# Altium PCB PCB.PcbDoc
Units mm, origin at the board's own origin, x right, y up, seen from the top; angles counter-clockwise.
Board outline 37.2 x 44.2 mm, 2 copper layers (Top Layer, Bottom Layer); 15 components, 11 nets, 90 pads, 32 vias.
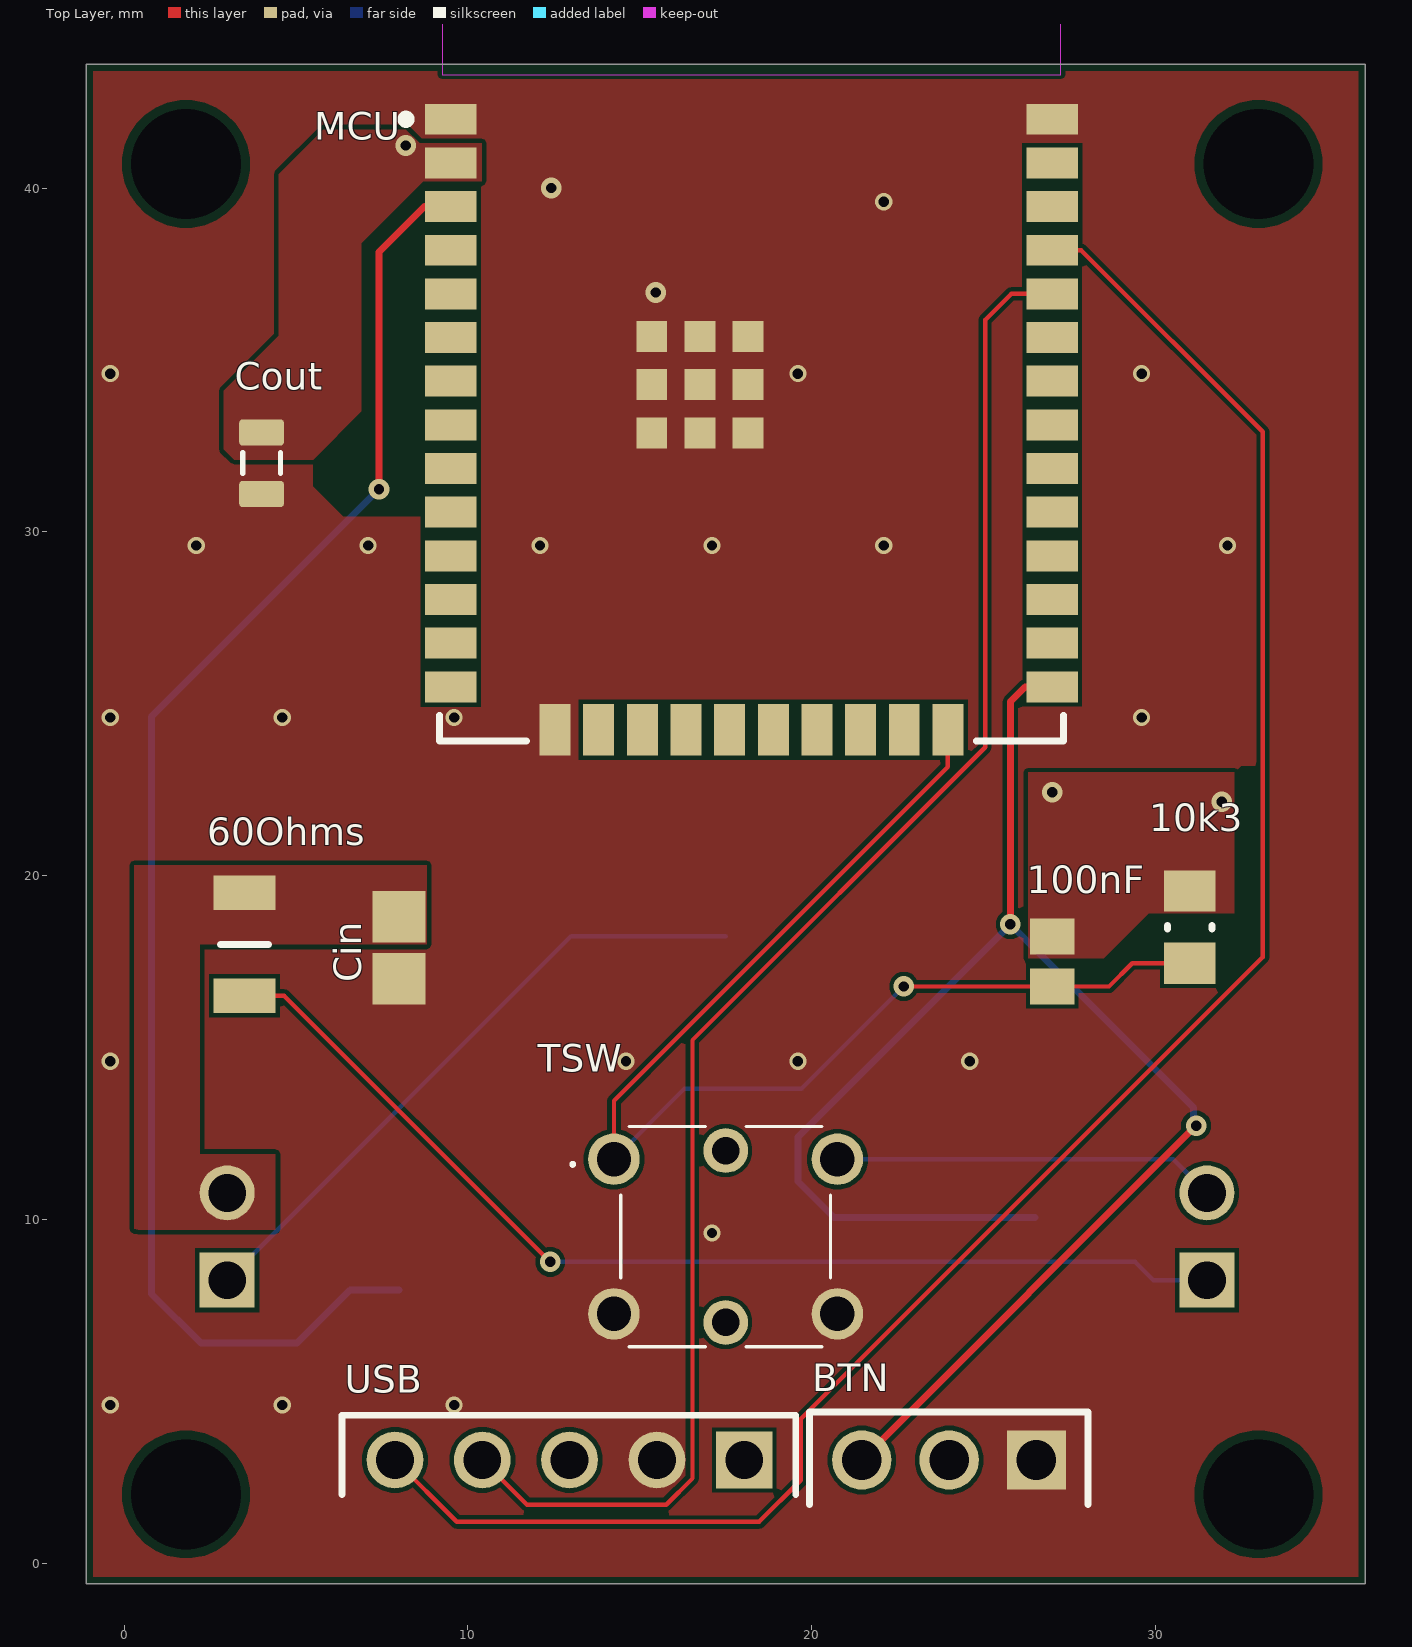
[diagram p0: Top Layer view]
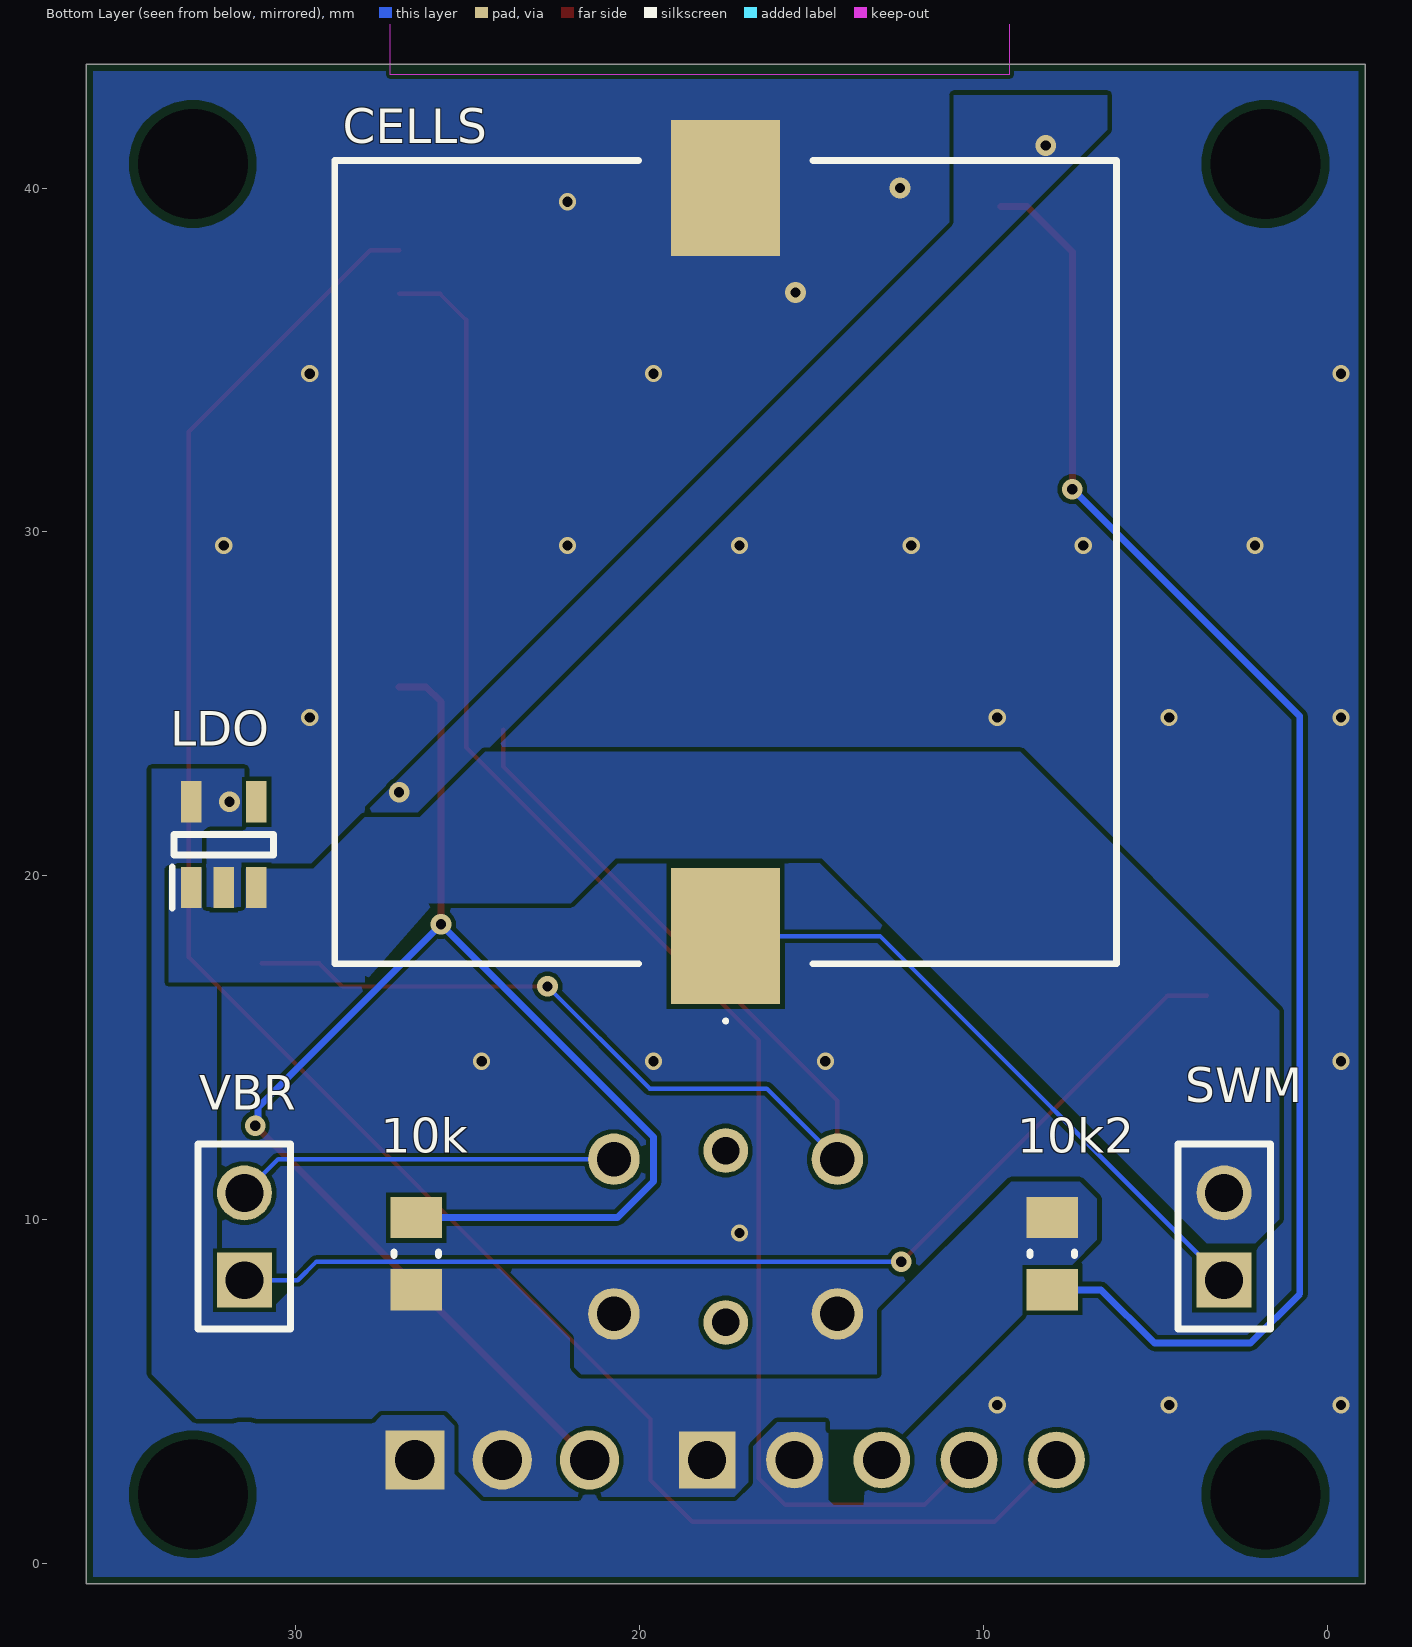
[diagram p1: Bottom Layer view, seen from below]
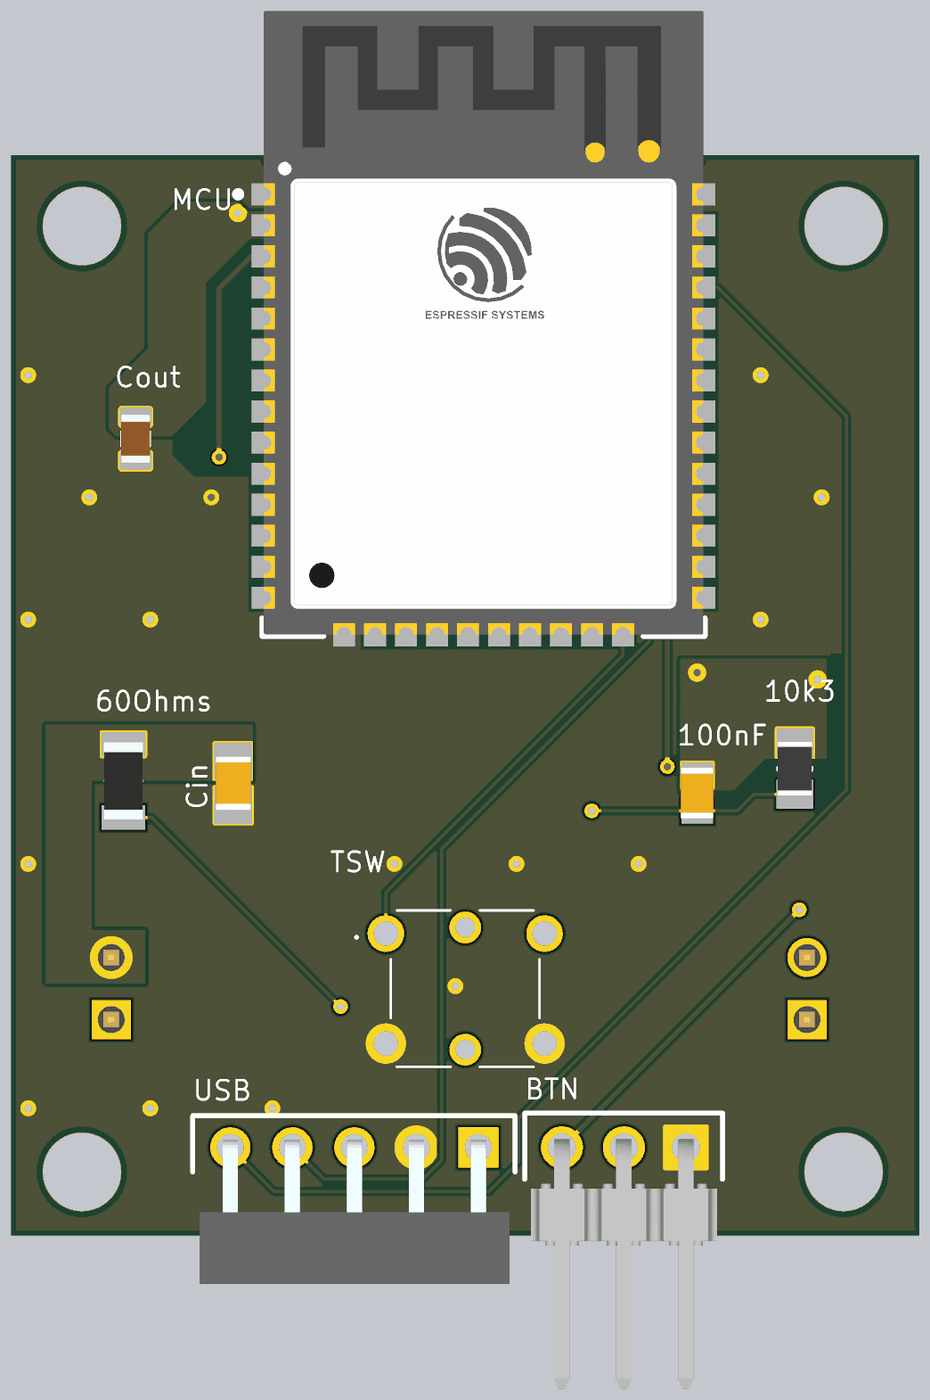
[diagram p2: 3D render of the assembled board from above, using the file's embedded part models]
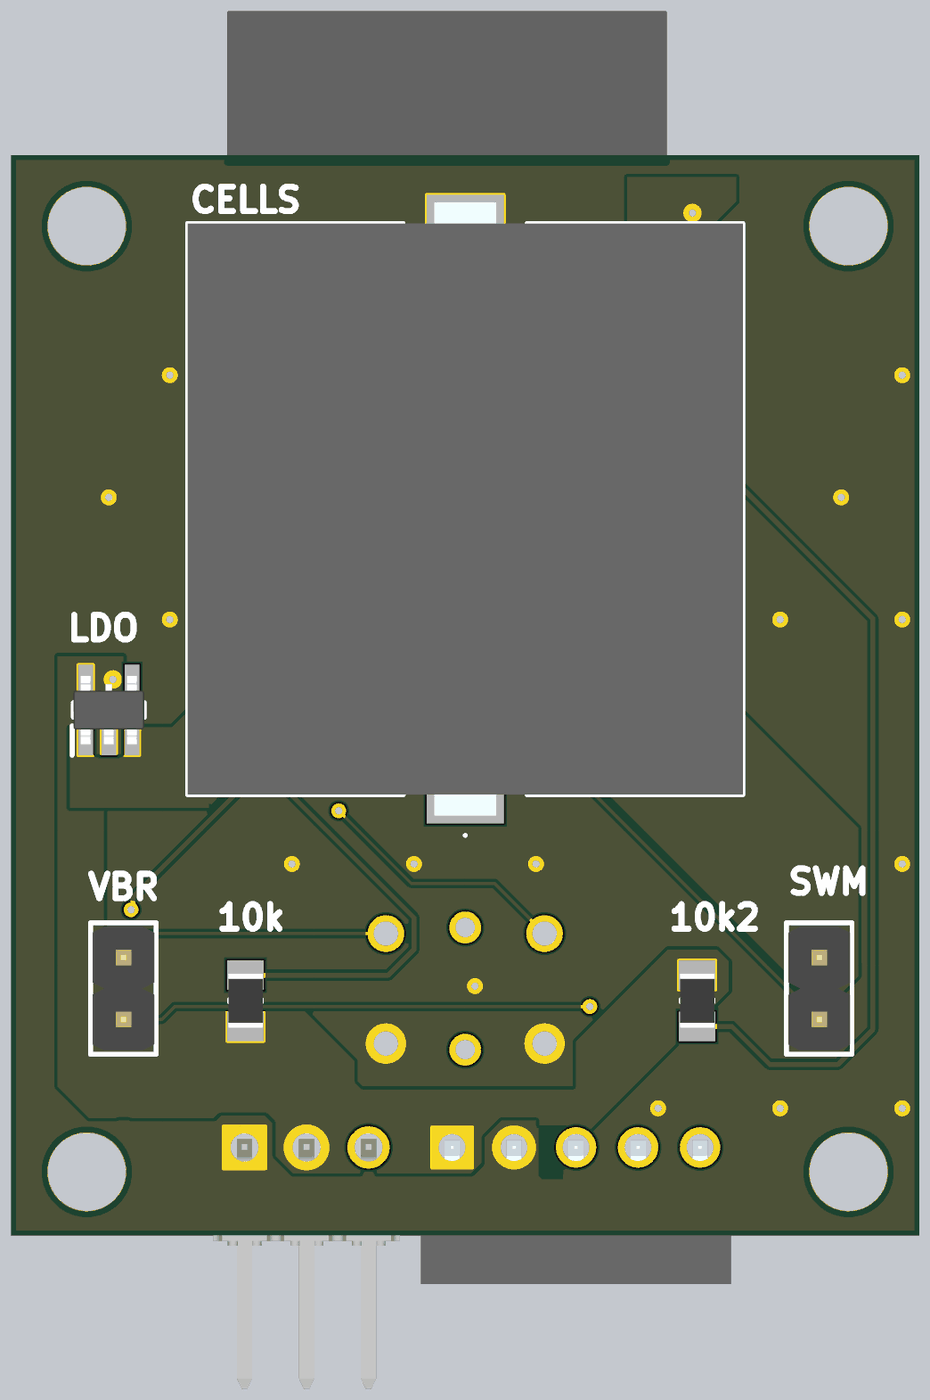
[diagram p3: 3D render of the assembled board from below, using the file's embedded part models]

## Layer stack, top to bottom
Top Solder: solder mask 0.0102, Solder Resist, Dk 3.5
Top Layer: signal copper 0.0356
Dielectric 1: dielectric 0.32, FR-4, Dk 4.8
Bottom Layer: signal copper 0.0356
Bottom Solder: solder mask 0.0102, Solder Resist, Dk 3.5

## Board outline
-1.1,-0.6 36.1,-0.6 36.1,43.6 -1.1,43.6

## Design rules (kind name [scope] priority, off if disabled: settings)
BoardOutlineClearance [All] p1: gap=0.2 ignorepadtopadclearanceinfootprint=FALSE
Clearance [All] p1: gap=0.127 ignorepadtopadclearanceinfootprint=FALSE except(0.25: Arc-Hole Track-Hole SMDPad-Hole THPad-Hole Via-Hole Fill-Hole Poly-Hole Region-Hole Text-Hole)
ComponentClearance [All] p1: gap=0.127 collisioncheckmode=3 verticalgap=0.127 showdistances=TRUE
DiffPairsRouting [All] p1: maxlimit=0.254 minlimit=0.127 mostfreqgap=0.127 toplayer_minwidth=0.127 toplayer_maxwidth=25.4 toplayer_prefwidth=0.127 bottomlayer_minwidth=0.127 bottomlayer_maxwidth=25.4 bottomlayer_prefwidth=0.127 maxuncoupledlength=12.7
Height [All] p1: minheight=0 maxheight=1816.048 prefheight=12.7
HoleSize [All] p1: absolutevalues=TRUE maxlimit=6.3 minlimit=0.3 maxpercent=80.000 minpercent=20.000
HoleToHoleClearance [All] p1: gap=0.25 allowstackedmicrovias=FALSE
MinimumAnnularRing [All] p1: minimumring=0.076
MinimumSolderMaskSliver [All] p1: minsoldermaskwidth=0
PlaneClearance [All] p1: clearance=0.127
PlaneConnect PlaneConnectPowerPads [InPadClass('PowerPads')] p1: planeconnectstyle=Direct reliefexpansion=0.508 reliefentries=4 reliefconductorwidth=0.254 reliefairgap=0.254
PlaneConnect [All] p2: planeconnectstyle=Direct reliefexpansion=0.3 reliefentries=4 reliefconductorwidth=0.127 reliefairgap=0.127
PolygonConnect PolygonConnectPowerPads [All vs (InPadClass('PowerPads'))] p1: connectstyle=Direct reliefconductorwidth=0.254 reliefentries=4 polygonreliefangle="90 Angle" airgapwidth=0.254
PolygonConnect [All] p2: connectstyle=Direct reliefconductorwidth=0.127 reliefentries=4 polygonreliefangle="90 Angle" airgapwidth=0.127
RoutingVias [All] p1: holewidth=0.3 width=0.6 viastyle="Through Hole" minholewidth=0.3 minwidth=0.6 maxholewidth=0.6 maxwidth=6.6
SilkToSilkClearance [All] p1: silktosilkclearance=0
SilkToSolderMaskClearance [IsPad] p1: minsilkscreentomaskgap=0.127 clearancetoexposedcopper=TRUE
SolderMaskExpansion [All] p1: expansion=0.075 istentingtop=FALSE
Width [All] p1: maxlimit=25.4 minlimit=0.127 preferedwidth=0.2 minimp=50.000000 maximp=50.000000 favimp=50.000000
20 further rules are at their usual default settings.

## Components (designator, comment, footprint, x,y, rotation, side; value= is the part's Value field where it differs from the comment)
10k "Resistor 10k +/-1% 0805 125 mW" RESC2013X50X35ML15T15 26.5,9 r90 bottom value=10k
10k2 "Resistor 10k +/-1% 0805 125 mW" RESC2013X50X35ML15T15 8,9 r270 bottom value=10k
10k3 "Resistor 10k +/-1% 0805 125 mW" RESC2013X50X35ML15T15 31,18.5 r90 top value=10k
60Ohms "CRCW120660R0KNEAIF" RESC3216X60N 3.5,18 r90 top
100nF "Capacitor 100 nF +/-10% 50 V 0805" CAPC2013X95X50LL10T25 27,17.5 r90 top value=100nF
BTN "68016-403HLF" HDRRA3W67P0X254_1X3_762X254X241P 26.54,3 r180 top
CELLS "1062" 1062 17.5,29.12 r180 bottom
Cin "Capacitor 1 uF +/- 10% 25 V 0805" CAPC2013X145X50ML20T25 8,17.9 r90 top value=1µF
Cout "Capacitor 100µF +/-20% 6.3V 0805" CAPC0805(2012)145_L 4,32 r90 top value=100µF
LDO "TPS7A2033PDBVR" SOT95P280X145-5N 32.1,20.9 r90 bottom
MCU "ESP32-WROOM-32D (16MB)" FP-ESP32-WROOM-32D_16MB-MFG 18.25,36.74 r0 top
SWM "61300211121" 61300211121 3,9.5 r90 bottom
TSW "TLL-62BG-S-V-B" TLL62BGSVB 14.25,11.75 r0 top
USB "801-87-005-20-002101" RHDRRA5W62P0X254_1X5_1270X295X254P 18.04,3 r180 top
VBR "61300211121" 61300211121 31.5,9.5 r90 bottom

## Footprints (in the part's own frame and the unit in brackets; to place one, negate y for a bottom-side part, rotate by r counter-clockwise, add the part's x,y. Pads: shape width x height; smd on the part's side, far side on the other; paste and mask are expansions set on the pad)
1062 [mm]
  rect 3.17x3.96 smd: 1(0,-10.88) 2(0,10.88)
  silkscreen extent -11.37,-13.4 11.37,11.69, body extent -11.37,-12.54 11.37,12.54, height 10.67
61300211121 [mm] "Pin Header, pitch 2.54 mm, THT, Vertical, single row, 2p"
  rect 1.6x1.6 hole 1.1: 1(-1.27,0)
  round 1.6 hole 1.1: 2(1.27,0)
  silkscreen extent -2.69,-1.34 2.69,1.35, body extent -2.54,-1.27 2.54,1.27, height 8.57
CAPC0805(2012)145_L [mm] "Chip Capacitor, Body 2.0x1.2mm, Height 1.45mm, IPC High Density"
  rrect25% 0.76x1.3 smd: 1(-0.9,0) 2(0.89,0)
  silkscreen extent -0.3,-0.55 0.3,0.55, body extent -1,-0.6 1,0.6, height 1.45
CAPC2013X95X50LL10T25 [mm] "Chip Capacitor, 2-Leads, Body 2.10x1.35mm, IPC High Density"
  rect 1.05x1.3 smd: 1(-0.725,0) 2(0.725,0)
  body extent -1.05,-0.67 1.05,0.67, height 0.95
CAPC2013X145X50ML20T25 [mm] "Chip Capacitor, 2-Leads, Body 2.2x1.45mm, IPC Low Density"
  rect 1.5x1.55 smd: 1(-0.9,0) 2(0.9,0)
  body extent -1.1,-0.72 1.1,0.73, height 1.45
FP-ESP32-WROOM-32D_16MB-MFG [mm]
  rect 1.5x0.9 smd paste+0 mask+0: 1(-8.75,5.26) 2(-8.75,3.99) 3(-8.75,2.72) 4(-8.75,1.45) 5(-8.75,0.18) 6(-8.75,-1.09) 7(-8.75,-2.36) 8(-8.75,-3.63) 9(-8.75,-4.9) 10(-8.75,-6.17) 11(-8.75,-7.44) 12(-8.75,-8.71) 13(-8.75,-9.98) 14(-8.75,-11.25) 25(8.75,-11.25) 26(8.75,-9.98) 27(8.75,-8.71) 28(8.75,-7.44) 29(8.75,-6.17) 30(8.75,-4.9) 31(8.75,-3.63) 32(8.75,-2.36) 33(8.75,-1.09) 34(8.75,0.18) 35(8.75,1.45) 36(8.75,2.72) 37(8.75,3.99) 38(8.75,5.26)
  rect 0.9x1.5 smd paste+0 mask+0: 15(-5.715,-12.5) 16(-4.445,-12.5) 17(-3.175,-12.5) 18(-1.905,-12.5) 19(-0.635,-12.5) 20(0.635,-12.5) 21(1.905,-12.5) 22(3.175,-12.5) 23(4.445,-12.5) 24(5.715,-12.5)
  rect 0.9x0.9 smd paste+0 mask+0: 39(-2.9,-3.86) 39(-2.9,-2.46) 39(-2.9,-1.06) 39(-1.5,-3.86) 39(-1.5,-2.46) 39(-1.5,-1.06) 39(-0.1,-3.86) 39(-0.1,-2.46) 39(-0.1,-1.06)
  Keep-Out Layer region: -9,6.56 9,6.56 9,12.75 -9,12.75
  silkscreen extent -10.17,-12.82 9.08,5.38, body extent -9.6,-13.35 9.6,12.93, height 0.25
HDRRA3W67P0X254_1X3_762X254X241P [mm]
  rect 1.725x1.725 hole 1.15: 1(0,0)
  round 1.725 hole 1.15: 2(2.54,0) 3(5.08,0)
  silkscreen extent -1.5,-1.4 6.6,1.3, body extent -1.27,-0.33 6.35,9.87, height 2.42
RESC2013X50X35ML15T15 [mm] "Chip Resistor, 2-Leads, Body 2.2x1.4mm, IPC Low Density"
  rect 1.2x1.5 smd: 1(-1.05,0) 2(1.05,0)
  silkscreen extent -0.05,-0.65 0.05,0.65, body extent -1.1,-0.7 1.1,0.7, height 0.5
RESC3216X60N [mm]
  rect 1x1.8 smd: 1(-1.5,0) 2(1.5,0)
  silkscreen extent 0,-0.7 0,0.7, body extent -1.58,-0.8 1.58,0.8, height 0.6
RHDRRA5W62P0X254_1X5_1270X295X254P [mm]
  rect 1.65x1.65 hole 1.1: 1(0,0)
  round 1.65 hole 1.1: 2(2.54,0) 3(5.08,0) 4(7.62,0) 5(10.16,0)
  silkscreen extent -1.5,-1.3 11.7,1, body extent -1.27,-0.31 11.43,5.6, height 2.54
SOT95P280X145-5N [mm]
  rect 1.2x0.6 smd: 1(-1.25,0.95) 2(-1.25,0) 3(-1.25,-0.95) 4(1.25,-0.95) 5(1.25,0.95)
  silkscreen extent -1.85,-1.45 0.3,1.5, body extent -1.4,-1.45 1.4,1.45, height 1.2
TLL62BGSVB [mm]
  round 1.5 hole 1: 1(0,0) 2(6.5,0) 3(0,-4.5) 4(6.5,-4.5)
  round 1.3 hole 0.8: 5(3.25,-4.75) 6(3.25,0.25)
  silkscreen extent -1.25,-5.45 6.3,0.95

## Part data
10k 10k2 10k3: library part CMP-009-00018-5, "Chip Resistor, 10 KOhm, +/- 1%, 125 mW, -55 to 155 degC, 0805 (2012 Metric)", Case/Package=0805, Max Operating Temperature=155°C, Min Operating Temperature=-55°C, Power=125mW, Tolerance=1%, Voltage Rating=150V, Mounting Technology=SM, Pins=2, RoHS Compliant=True
60Ohms: "Resistor", Manufacturer_Name=Vishay, Mouser Part Number=71-CRCW120660R0KNAIF, Datasheet Link=http://componentsearchengine.com/Datasheets/1/CRCW120660R0KNEAIF.pdf, Height=0.6mm, Manufacturer_Part_Number=CRCW120660R0KNEAIF, Mouser Price/Stock=https://www.mouser.co.uk/ProductDetail/Vishay-Dale/CRCW120660R0KNEAIF?qs=0LP1uVfdam9gTU37MuGrNg%3D%3D
100nF: library part CMP-001-00018-6, "Chip Capacitor, 100 nF, +/- 10%, 50 V, 0805 (2012 Metric)", Capacitor Type=Ceramic, Case/Package=0805, Max Operating Temperature=125°C, Min Operating Temperature=-55°C, Tolerance=10%, Voltage Rating=50V, Mounting Technology=SM, Pins=2, RoHS Compliant=True
BTN: "Connector", Manufacturer_Name="Amphenol Communications Solutions", Mouser Part Number=649-68016-403HLF, Arrow Part Number=68016-403HLF, Arrow Price/Stock=https://www.arrow.com/en/products/68016-403hlf/amphenol-fci?region=nac, Datasheet Link=https://cdn.amphenol-cs.com/media/wysiwyg/files/drawing/68015.pdf, Height=2.41mm, Manufacturer_Part_Number=68016-403HLF, Mouser Price/Stock=https://www.mouser.co.uk/ProductDetail/Amphenol-FCI/68016-403HLF?qs=osVJq4lsVJcI0%252Bykiqpb0w%3D%3D
CELLS: "Battery", Manufacturer_Name="Keystone Electronics", Mouser Part Number=534-1062, Datasheet Link=https://www.keyelco.com/product-pdf.cfm?p=728, Height=10.57mm, Manufacturer_Part_Number=1062, Mouser Price/Stock=https://www.mouser.co.uk/ProductDetail/Keystone-Electronics/1062?qs=TMDrOSIpnUdOWsMNtyKpVg%3D%3D
Cin: library part CMP-001-00010-6, "Chip Capacitor, 1 uF, +/-10%, 25 V, 0805 (2012 Metric)", Capacitor Type=Ceramic, Case/Package=0805, Max Operating Temperature=125°C, Min Operating Temperature=-55°C, Tolerance=10%, Voltage Rating=25V, Mounting Technology=SM, Pins=2, RoHS Compliant=True
Cout: library part CMP-001-00054-4, "Chip Capacitor, 100µF +/-20%, 6.3V, 0805, Thickness 1.45 mm", Case/Package=0805, Max Operating Temperature=85°C, Min Operating Temperature=-55°C, Tolerance=10%, Voltage Rating=6.3V, Mounting Technology=SMT, Pins=2
LDO: library part CMP-007-000000-1, "300-mA, Ultra-Low-Noise, Low-IQ, High PSRR LDO", Manufacturer_Name="Texas Instruments", Mouser Part Number=595-TPS7A2033PDBVR, Datasheet Link=https://www.ti.com/lit/ds/symlink/tps7a20.pdf?ts=1603960048570&ref_url=https%253A%252F%252Fwww.ti.com%252Fstore%252Fti%252Fen%252Fp%252Fproduct%252F%253Fp%253DPTPS7A2045PDQNR%2526keyMatch%253DPTPS7A2045PDQNR%2526tisearch%253DSearch-EN-everything, Design Item ID=TPS7A2033PDBVR, Geometry.Height=1.45mm, Manufacturer_Part_Number=TPS7A2033PDBVR, Mouser Price/Stock=https://www.mouser.co.uk/ProductDetail/Texas-Instruments/TPS7A2033PDBVR?qs=hd1VzrDQEGjk%2FOBnRfKB4A%3D%3D, Source=TPS7A2033PDBVR.SchLib
MCU: library part CMP-194065-000022-1, "RX TXRX MOD WIFI TRACE ANT SMD", Case/Package=SMD/SMT, Frequency=2.5GHz, Max Operating Temperature=85°C, Min Operating Temperature=-40°C, Data Rate=150Mbps, Interface=I2C, Memory Size=536KB, Mount="Surface Mount", Packaging="Tape and Reel", Sensitivity=-98dBm
SWM VBR: library part CMP-1712-00002-4, "THT Vertical Pin Header WR-PHD, Pitch 2.54 mm, Single Row, 2 pins", Contact Resistance=20mOhm, Manufacturer="Wurth Elektronik", Operating Temperature=-40to105degC, Rated Current=3A, Withstanding Voltage=500VAC, Working Voltage=250VAC, Datasheet URL=https://katalog.we-online.de/em/datasheet/6130xx11121.pdf, Gender=Male, Manufacturer URL=http://www.we-online.de, Mounting Technology=THT, Orientation=Vertical, Package Reference=61300211121, Packaging=Bag, Part Number=61300211121, Pin Number=2, Pitch=2.54mm, Publisher=WurthElektronik, Row Number=Single
TSW: library part CMP-010-000000-1, "Tactile Switches Through Hole 6.1*6.1 (LED Color)", Manufacturer_Name=Diptronics, Mouser Part Number=113-TLL-62BG-S-V-B, Design Item ID=TLL-62BG-S-V-B, Geometry.Height=7mm, Manufacturer_Part_Number=TLL-62BG-S-V-B, Mouser Price/Stock=https://www.mouser.co.uk/ProductDetail/Diptronics/TLL-62BG-S-V-B?qs=gTYE2QTfZfQEDhaDh6DnIQ%3D%3D, Source=TLL-62BG-S-V-B.SchLib
USB: "Connector", Manufacturer_Name=Preci-Dip, Mouser Part Number=437-8018700520002101, Datasheet Link=https://www.precidip.com/AppHost/9696,1/Scripts/Modules/Catalog/Default.aspx?c=7&i=219&p=86&pdf=1&dsku=801-PP-NNN-20-002101, Height=2.54mm, Manufacturer_Part_Number=801-87-005-20-002101, Mouser Price/Stock=https://www.mouser.co.uk/ProductDetail/Preci-dip/801-87-005-20-002101?qs=q5BRkYolQ3je8P8riDHomg%3D%3D

## Free pads (board coordinates)
  round 1.524 hole 3.2: 5(1.8,40.7) 6(33,40.7) 7(33,2) 8(1.8,2)

## Via types
v1: diameter 0.5, hole 0.3, Top Layer to Bottom Layer, 22 vias
v2: diameter 0.6, hole 0.3, Top Layer to Bottom Layer, 10 vias

## Nets (pads, with @x,y where several pads share a name; then routed paths per layer and width w, separated by ;. In a path a pad name is that pad's centre, name@x,y a point inside that pad or via, vN(x,y) a via of type N, cw(c..) or ccw(c..) an arc to the next point about the centre after c; other vN are vias at no path point)
1: 10k3.1 100nF.1 MCU.24 TSW.1 | length 35.6
  Top Layer w0.127: TSW.1 14.25,13.45 23.965,23.165 MCU.24 ; v2(22.682,16.775) 100nF.1 28.651,16.775 29.326,17.45 10k3.1
  Bottom Layer w0.127: TSW.1 16.303,13.803 19.71,13.803 v2(22.682,16.775)
3v3: 10k2.1 10k3.2 10k.1 100nF.2 BTN.2 Cout.2 LDO.5 MCU.2 USB.1
  other v2: 31.932,22.15 27,22.428 8.191,41.237
BOOT: 10k.2 BTN.3 MCU.25 | length 47.1
  Top Layer w0.2: BTN.3 v2(31.186,12.726) ; v2(25.781,18.581) 25.781,25.058 26.213,25.49 MCU.25
  Bottom Layer w0.2: 10k.2 20.65,10.05 19.6,11.1 19.6,12.4 v2(25.781,18.581) 31.11,13.252 31.11,12.803 v2(31.186,12.726)
GND: BTN.1 CELLS.2 Cin.1 Cout.1 LDO.2 MCU.1 MCU.15 MCU.38 MCU.39 TSW.3 TSW.4 USB.2
  other v1: -0.4,4.6 4.6,4.6 9.6,4.6 17.1,9.6 -0.4,14.6 14.6,14.6 19.6,14.6 24.6,14.6 -0.4,24.6 4.6,24.6 9.6,24.6 29.6,24.6 2.1,29.6 7.1,29.6 12.1,29.6 17.1,29.6 22.1,29.6 32.1,29.6 -0.4,34.6 19.6,34.6 29.6,34.6 22.1,39.6
  other v2: 15.469,36.961 12.43,40
Net10k2_2: 10k2.2 MCU.3 | length 44.1
  Top Layer w0.2: v2(7.417,31.242) 7.417,38.139 8.738,39.46 MCU.3
  Bottom Layer w0.2: v2(7.417,31.242) 0.8,24.625 0.8,7.835 2.235,6.4 5.028,6.4 6.578,7.95 10k2.2
Net60Ohms_1: 60Ohms.1 VBR.1 | length 31.4
  Top Layer w0.127: 60Ohms.1 4.658,16.5 v2(12.395,8.763)
  Bottom Layer w0.127: v2(12.395,8.763) 29.413,8.763 29.946,8.23 VBR.1
NetCELLS_1: CELLS.1 SWM.1 | length 18.6
  Bottom Layer w0.127: SWM.1 13.01,18.24 CELLS.1
NetTSW_2: TSW.2 VBR.2 | length 11.2
  Bottom Layer w0.127: TSW.2 30.52,11.75 VBR.2
RX: MCU.34 USB.4 | length 46.5
  Top Layer w0.127: USB.4 11.72,1.7 15.772,1.7 16.535,2.464 16.535,15.215 25.05,23.729 25.05,36.164 25.806,36.92 MCU.34
TX: MCU.35 USB.5 | length 57.4
  Top Layer w0.127: USB.5 9.68,1.2 18.472,1.2 19.685,2.413 19.685,4.191 33.122,17.628 33.122,32.907 27.838,38.19 MCU.35
VCC+: 60Ohms.2 Cin.2 LDO.1 LDO.3 SWM.2
pads on no net: LDO.4 MCU.4 MCU.5 MCU.6 MCU.7 MCU.8 MCU.9 MCU.10 MCU.11 MCU.12 MCU.13 MCU.14 MCU.16 MCU.17 MCU.18 MCU.19 MCU.20 MCU.21 MCU.22 MCU.23 MCU.26 MCU.27 MCU.28 MCU.29 MCU.30 MCU.31 MCU.32 MCU.33 MCU.36 MCU.37 TSW.5 TSW.6 USB.3

## Polygon pours and split planes (outlines as drawn)
GND on Top Layer "GND_L01_P014" (solid, pour order 14): -4,44.6 39.1,44.6 39.2,44.5 39.2,-6.1 -3.5,-6.1 -4,-5.6
3v3 on Top Layer "3V3_L01_P002" (solid, pour order 2): 26.3,17.6 26.3,23 32.3,23 32.3,18.9 29.8,18.9 28.5,17.6
3v3 on Top Layer "3V3_L01_P001" (solid, pour order 1): 8.7,40.2 10.4,40.2 10.4,41.3 8.6,41.3 8.2,41.7 5.8,41.7 4.5,40.4 4.5,35.7 2.9,34.1 2.9,32.4 3.2,32.1 5.5,32.1 6.9,33.5 6.9,38.4
VCC+ on Top Layer "VCC+_L01_P000" (solid, pour order 0): 8.8,18 8.8,20.3 0.3,20.3 0.3,9.721 0.293,9.715 0.3,9.708 0.3,9.7 4.4,9.7 4.4,11.9 2.2,11.9 2.2,18
GND on Bottom Layer "GND_L02_P015" (solid, pour order 15): 37.7,45 38.8,43.9 38.8,-1.1 38.7,-1.1 36,-3.8 -1.7,-3.8 -1.7,-3.2 -3.3,-1.6 -3.3,44.5 -2.8,45
GND on Bottom Layer "GND_L02_P005" (solid, pour order 5): 13.1,8.4 21.7,8.4 21.9,8.2 21.9,5.7 21.7,5.5 13.1,5.5
3v3 on Bottom Layer "3V3_L02_P013" (solid, pour order 13): 31.5,23.1 34.2,23.1 34.2,5.5 32.9,4.2 27,4.2 24.6,1.8 14.3,1.8 7.2,8.9 6.7,9.4 6.7,10.6 7.2,11.1 9.2,11.1 14.8,5.5 21,5.5 24.1,8.6 29.5,8.6 30.7,7.4 32.3,7.4 32.3,21.3 31.5,21.3
3v3 on Bottom Layer "3V3_L02_P012" (solid, pour order 12): 28,21.7 26.4,21.7 6.4,41.7 6.4,42.7 11,42.7 11,39 28.2,21.8
VCC+ on Bottom Layer "VCC+_L02_P009" (solid, pour order 9): 26,19.2 28,16.9 28,19.2
VCC+ on Bottom Layer "VCC+_L02_P008" (solid, pour order 8): 1.4,10 2.1,9.3 3.5,9.3 14.4,20.2 14.7,20.5 20.7,20.5 22,19.2 28,19.2 28,16.9 33.7,16.9 33.7,20.3 33.6,20.2 29.5,20.2 28,21.7 26.4,21.7 24.5,23.6 8.927,23.6 1.401,16.074
GND on Bottom Layer "GND_L02_P007" (solid, pour order 7): 14.6,4.1 16,4.1 16.7,3.4 16.7,2.3 17.2,1.8 24.6,1.8 25.4,2.6 25.4,4 25.7,4.3 27.5,4.3 27.8,4 27.8,0.3 14.6,0.3
GND on Bottom Layer "GND_L02_P004" (solid, pour order 4): 11,42.7 20.4,42.7 30.5,32.6 30.5,21.3 32.5,21.3 32.6,21.2 32.6,19.1 31.6,19.1 31.6,20.4 29.6,20.4 11,39 11,41

## Other copper
Top Layer:
  pour cut-out: 8.65,40 7.037,38.387 7.037,33.443 5.557,31.963 5.5,31.963 5.5,31.325 6.375,30.45 8.625,30.45
  pour cut-out: 27.777,17.427 27.777,16.969 28.651,16.969 29.326,17.644 30.123,17.644 30.123,18.177 31.463,16.837 32.057,16.837 32.927,17.708 32.9,17.735 32.9,23.2 32.5,23.2 32.397,23.097 32.437,23.057 32.437,18.843 32.357,18.763 29.857,18.763 28.597,17.503
Bottom Layer:
  pour cut-out: 13.327,3.887 13.34,3.9 14.5,3.9 14.5,1.837 14.363,1.7 13.5,1.7

## Silkscreen, mask and mechanical layers (free items; w line width, h text height)
Mechanical 1:
  the board outline again, w0.2